# Altium PCB PCB1.pcbdoc
Units mm, origin at the board's own origin, x right, y up, seen from the top; angles counter-clockwise.
Board outline 81.1 x 38.7 mm, 2 copper layers (Top Layer, Bottom Layer); 45 components, 39 nets, 201 pads, 4 vias.
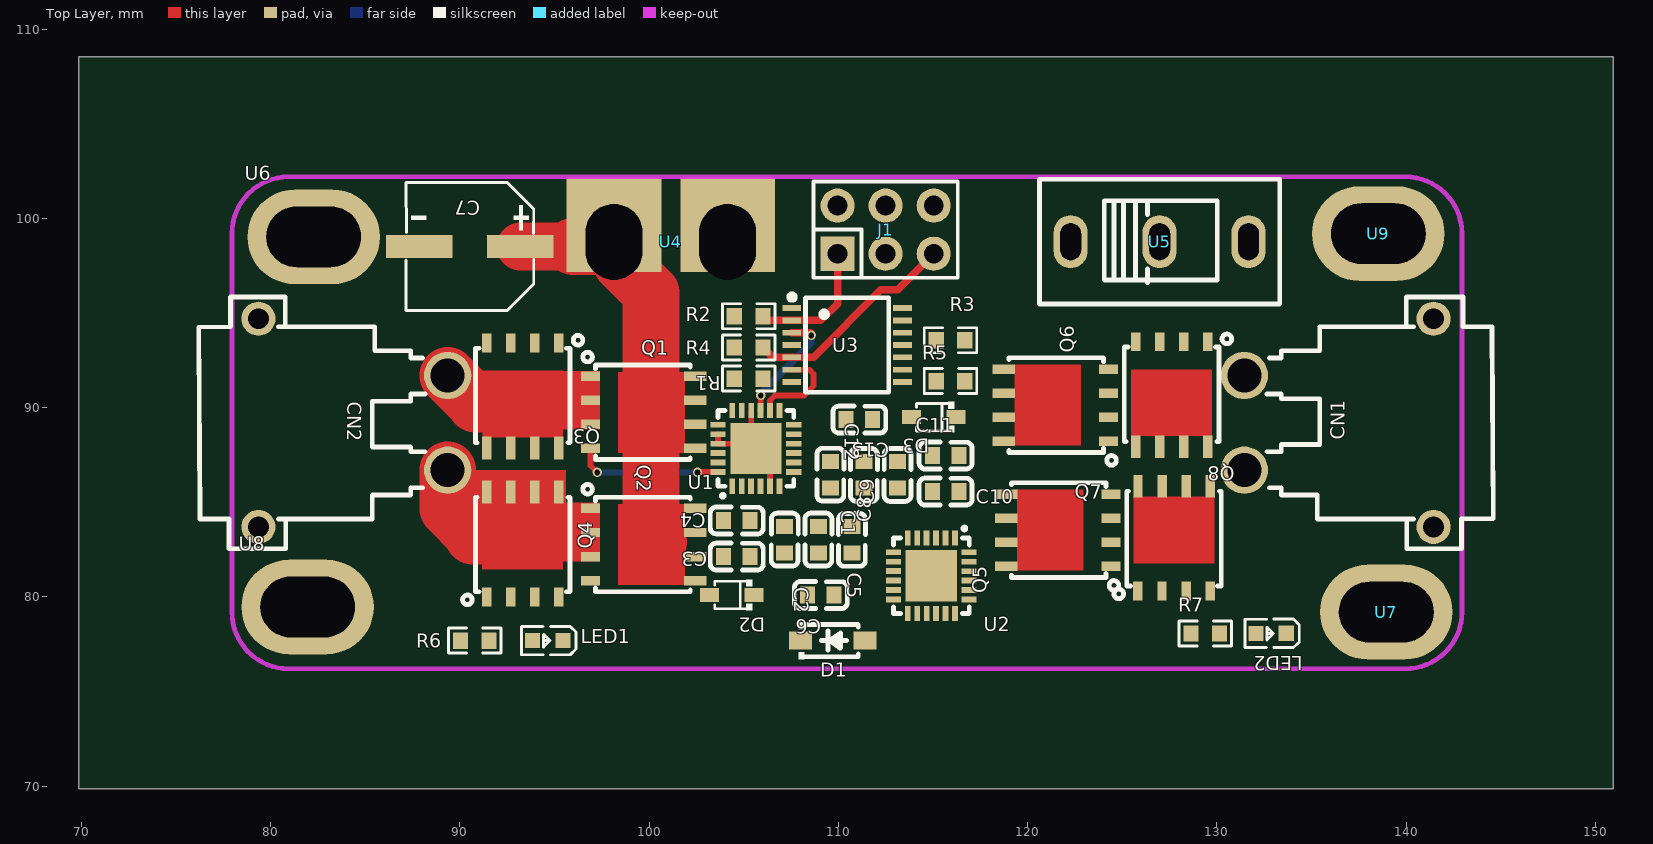
[diagram p0: Top Layer view]
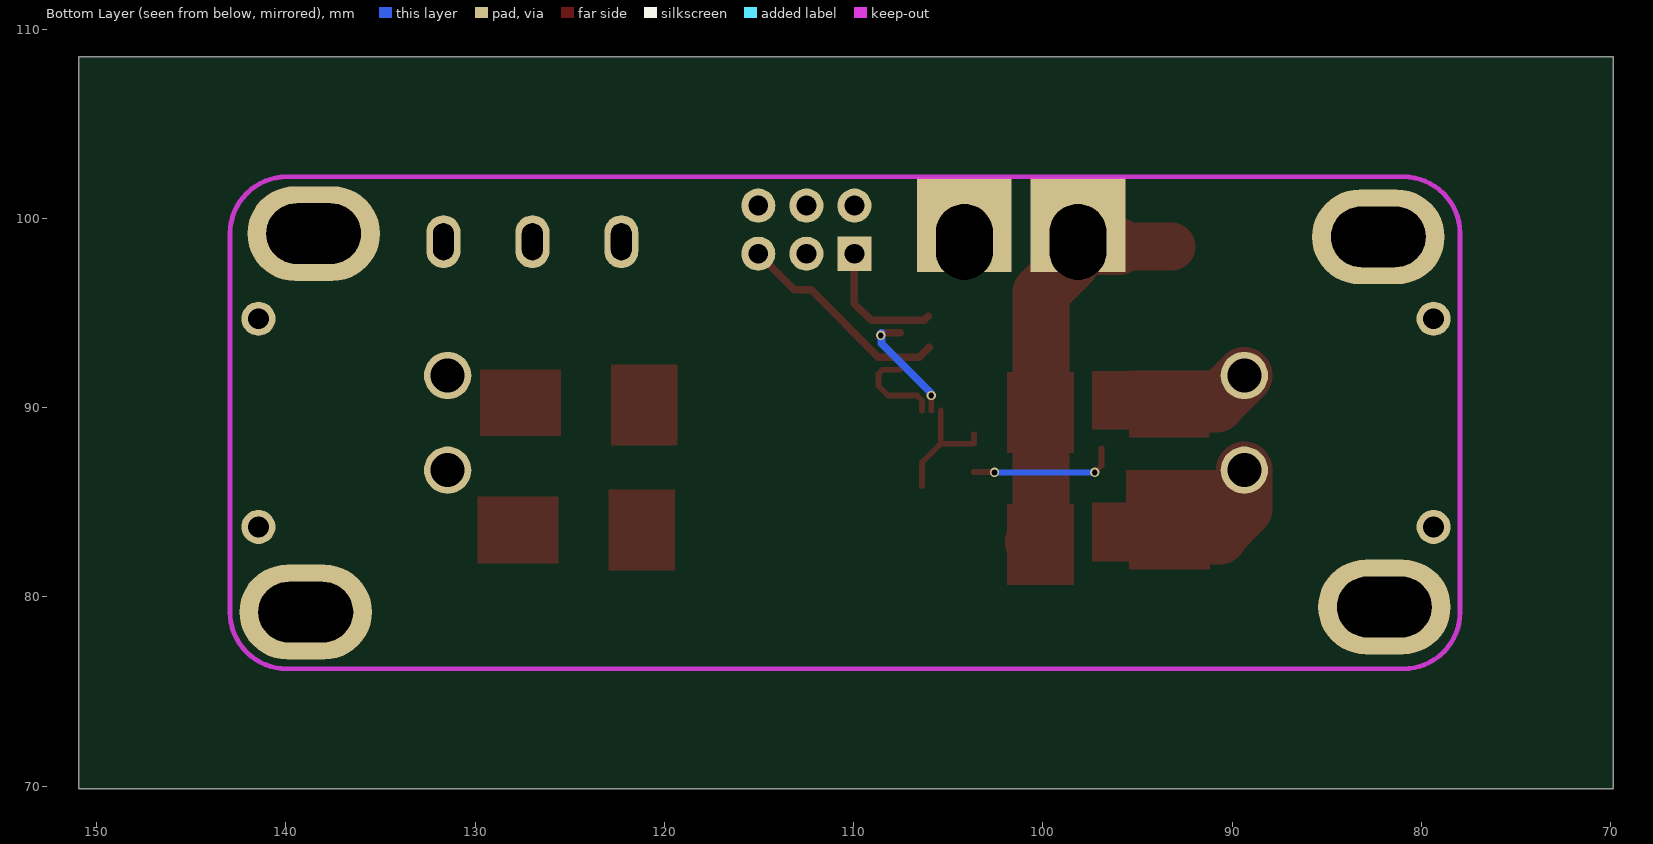
[diagram p1: Bottom Layer view, seen from below]

## Layer stack, top to bottom
Top Layer: signal copper (thickness not stored)
Dielectric: dielectric 0.32, FR-4, Dk 4.8
Bottom Layer: signal copper (thickness not stored)

## Board outline
150.949,69.85 69.85,69.85 69.85,108.55 150.949,108.55

## Components (designator, comment, footprint, x,y, rotation, side; value= is the part's Value field where it differs from the comment)
C1 "CAP_0603" C0603 108.938,83.023 r270 top
C2 "CAP_0603" C0603 107.16,83.023 r270 top
C3 "CAP_0603" C0603 104.62,82.134 r180 top
C4 "CAP_0603" C0603 104.62,84.039 r180 top
C5 "1uF" C0603 110.716,83.023 r90 top
C6 "1uF" C0603 109.065,80.102 r180 top
C7 "RVT1E221M0607" CAP-SMD_BD6.3-L6.6-W6.6-LS7.4-FD 90.523,98.517 r180 top
C8 "CAP_0603" C0603 111.351,86.452 r90 top
C9 "CAP_0603" C0603 113.129,86.452 r90 top
C10 "CAP_0603" C0603 115.669,85.563 r0 top
C11 "CAP_0603" C0603 115.669,87.468 r0 top
C12 "1uF" C0603 109.573,86.452 r270 top
C13 "1uF" C0603 111.097,89.373 r180 top
CN1 "XT30PW-M" CONN-TH_XT30PW-M 136.45,89.2 r90 top
CN2 "XT30PW-M" CONN-TH_XT30PW-M 84.35,89.2 r270 top
D1 "BZT52C3V3" SOD-123_L2.7-W1.6-LS3.7-RD-1 109.7,77.689 r0 top
D2 "1N5819WS_C191023" SOD-323_L1.8-W1.3-LS2.5-RD 104.366,80.102 r180 top
D3 "1N5819WS_C191023" SOD-323_L1.8-W1.3-LS2.5-RD 115.034,89.5 r180 top
J1 "2.54-2*3P针" HDR-TH_6P-P2.54-V-M-R2-C3-S2.54-1 112.494,99.406 r0 top
LED1 "LED_0603-R" LED_0603 94.587,77.689 r180 top
LED2 "LED_0603-R" LED_0603 132.814,78.07 r180 top
Q1 "TPH1R403NL,L1Q(M" DSOP-8_L5.0-W5.0-P1.27-LS6.0-BL-EP 99.667,89.754 r270 top
Q2 "TPH1R403NL,L1Q(M" DSOP-8_L5.0-W5.0-P1.27-LS6.0-BL-EP 99.667,82.769 r270 top
Q3 "TPH1R403NL,L1Q(M" DSOP-8_L5.0-W5.0-P1.27-LS6.0-BL-EP 93.317,90.643 r180 top
Q4 "TPH1R403NL,L1Q(M" DSOP-8_L5.0-W5.0-P1.27-LS6.0-BL-EP 93.315,82.769 r0 top
Q5 "TPH1R403NL,L1Q(M" DSOP-8_L5.0-W5.0-P1.27-LS6.0-BL-EP 121.638,83.531 r90 top
Q6 "TPH1R403NL,L1Q(M" DSOP-8_L5.0-W5.0-P1.27-LS6.0-BL-EP 121.511,90.135 r90 top
Q7 "TPH1R403NL,L1Q(M" DSOP-8_L5.0-W5.0-P1.27-LS6.0-BL-EP 127.733,83.081 r0 top
Q8 "TPH1R403NL,L1Q(M" DSOP-8_L5.0-W5.0-P1.27-LS6.0-BL-EP 127.607,90.712 r180 top
R1 "Res_0603" R0603 105.255,91.532 r180 top
R2 "Res_0603" R0603 105.255,94.834 r0 top
R3 "Res_0603" R0603 115.923,93.564 r0 top
R4 "Res_0603" R0603 105.255,93.183 r0 top
R5 "Res_0603" R0603 115.923,91.405 r0 top
R6 "Res_0603" R0603 90.777,77.689 r0 top
R7 "Res_0603" R0603 129.385,78.07 r180 top
U1 "DRV8701ERGET" VQFN-24_L4.0-W4.0-P0.50-LS4.0-BL-EP 105.635,87.851 r0 top
U2 "DRV8701ERGET" VQFN-24_L4.0-W4.0-P0.50-LS4.0-BL-EP 114.908,81.116 r180 top
U3 "SN74HC125PWR" TSSOP-14_L5.0-W4.4-P0.65-LS6.5-BL 110.462,93.31 r270 top
U4 "电源线焊盘" 电源线焊盘 101.191,99.787 r0 top
U5 "SS-12D10-G5" SW-TH_SS-12D10-G050 126.972,98.771 r0 top
U6 "M3-MountSlot" M3-MountSlot 82.268,99.025 r0 top
U7 "M3-MountSlot" M3-MountSlot 138.95,79.2 r0 top
U8 "M3-MountSlot" M3-MountSlot 81.95,79.467 r0 top
U9 "M3-MountSlot" M3-MountSlot 138.529,99.2 r0 top

## Footprints (in the part's own frame and the unit in brackets; to place one, negate y for a bottom-side part, rotate by r counter-clockwise, add the part's x,y. Pads: shape width x height; smd on the part's side, far side on the other; paste and mask are expansions set on the pad)
C0603 [mm]
  rect 0.8x0.9 smd paste+0 mask+0.051: 1(-0.7,0) 2(0.7,0)
  silkscreen extent -1.41,-0.71 1.39,0.72
CAP-SMD_BD6.3-L6.6-W6.6-LS7.4-FD [mm]
  rect 3.5x1.199 smd paste+0 mask+0.051: 1(-2.67,0) 2(2.67,0)
  silkscreen extent -3.38,-3.38 3.38,3.38
CONN-TH_XT30PW-M [mm]
  round 2.5 hole 1.8 paste+0 mask+0.051: 1(-2.5,5) 2(2.5,5)
  round 1.8 hole 1.1 paste+0 mask+0.051: 3(5.5,-5) 4(-5.5,-5)
  silkscreen extent -6.65,-8.15 6.65,3.81
DSOP-8_L5.0-W5.0-P1.27-LS6.0-BL-EP [mm]
  rect 0.5x1 smd paste-100 mask+0.05: 1(-1.906,-2.77) 2(-0.636,-2.77) 3(0.634,-2.77) 4(1.904,-2.77)
  rect 0.5x1.2 smd paste-100 mask+0.05: 5(1.906,2.77) 6(0.636,2.77) 7(-0.634,2.77) 8(-1.904,2.77)
  Top Layer region: -2.125,2.2 2.125,2.2 2.125,-1.3 -2.125,-1.3
  silkscreen extent -3.17,-3.17 2.5,2.5
HDR-TH_6P-P2.54-V-M-R2-C3-S2.54-1 [mm]
  rect 1.801x1.801 hole 1.049 paste+0 mask+0.051: 1(-2.54,-1.27)
  round 1.801 hole 1.049 paste+0 mask+0.051: 2(-2.54,1.27) 3(0,-1.27) 4(0,1.27) 5(2.54,-1.27) 6(2.54,1.27)
  silkscreen extent -3.81,-2.54 3.81,2.54
LED_0603 [mil]
  rect 31.5x31.5 smd paste+0 mask+2: 1(-33.5,-0.4) 2(29.5,-0.2)
  silkscreen extent -61,-30 53,30
M3-MountSlot [mm]
  oval 7x5 hole 3.2 slot 5 at 0 deg mask+0.051: 1(0,0)
R0603 [mm]
  rect 0.806x0.864 smd paste-100 mask+0.051: 1(-0.753,0) 2(0.753,0)
  silkscreen extent -1.39,-0.66 1.39,0.66
SOD-123_L2.7-W1.6-LS3.7-RD-1 [mm]
  rect 1.2x0.95 smd paste+0 mask+0.051: 1(-1.7,0) 2(1.7,0)
  silkscreen extent -1.81,-0.98 1.35,0.98
SOD-323_L1.8-W1.3-LS2.5-RD [mm]
  rect 1x0.75 smd paste+0 mask+0.051: 1(-1.173,0) 2(1.173,0)
  silkscreen extent -1.08,-0.8 0.9,0.8
SW-TH_SS-12D10-G050 [mm]
  oval 1.8x2.8 hole 1.1 slot 1.95 at 90 deg paste+0 mask+0.05: 1(-4.7,0) 2(0,0) 3(4.7,0)
  silkscreen extent -6.35,-3.3 6.35,3.3
TSSOP-14_L5.0-W4.4-P0.65-LS6.5-BL [mil]
  rect 12x39 smd paste+0 mask+1.97: 1(-76.8,-115.2) 2(-51.2,-115.2) 3(-25.6,-115.2) 4(0,-115.2) 5(25.6,-115.2) 6(51.2,-115.2) 7(76.8,-115.2) 8(76.8,115.2) 9(51.2,115.2) 10(25.6,115.2) 11(0,115.2) 12(-25.6,115.2) 13(-51.2,115.2) 14(-76.8,115.2)
  silkscreen extent -106,-121 98,87
VQFN-24_L4.0-W4.0-P0.50-LS4.0-BL-EP [mm]
  rect 0.3x0.8 smd paste-100 mask+0.05: 1(-1.25,-1.999) 2(-0.751,-2) 3(-0.25,-2) 4(0.25,-2) 5(0.751,-2) 6(1.251,-2) 13(1.25,2) 14(0.749,2) 15(0.249,2) 16(-0.25,2) 17(-0.749,2) 18(-1.25,2)
  rect 0.8x0.3 smd paste-100 mask+0.05: 7(2.001,-1.25) 8(2.001,-0.75) 9(2.001,-0.249) 10(2.001,0.251) 11(2.001,0.752) 12(2.001,1.251) 19(-2.001,1.25) 20(-2.001,0.75) 21(-2.001,0.251) 22(-2.001,-0.248) 23(-2.001,-0.749) 24(-2.001,-1.249)
  rect 2.7x2.7 smd paste-100 mask+0.05: 25(0.001,-0.002)
  silkscreen extent -2,-2.6 2,2
电源线焊盘 [mm]
  rect 5x5 hole 3 slot 4 at 90 deg copper offset 0,0.9 mask+0.051: 1(-3.048,-1.027) 2(2.952,-1.027)

## Via types
v1: diameter 0.5, hole 0.3, Top Layer to Bottom Layer, 4 vias

## Nets (pads, with @x,y where several pads share a name; then routed paths per layer and width w, separated by ;. In a path a pad name is that pad's centre, name@x,y a point inside that pad or via, vN(x,y) a via of type N, cw(c..) or ccw(c..) an arc to the next point about the centre after c; other vN are vias at no path point)
3V3: D1.1 R1.1 R7.2 U5.1
$1N6400: C2.2 C3.1 C4.1 D2.1 U1.1
$1N6511: C2.1 U1.2
$1N6531: C1.2 U1.3
$1N6589: C1.1 U1.4
$1N6702: C5.2 U1.6 U1.7 U1.12
$1N9279: Q1.4 U1.24 | length 2.5
  Top Layer w0.3: Q1.4 96.897,86.936 v1(97.254,86.579) ; v1@102.574,86.601 U1.24
  other v1: 102.552,86.579
$1N9610: Q3.4 U1.22
$1N14764: C13.2 U2.8
$1N14770: C12.2 U2.6 U2.7 U2.12
$1N14771: C8.1 U2.4
$1N14772: C9.2 C10.1 C11.1 D3.1 U2.1
$1N14774: C8.2 U2.3
$1N14775: C9.1 U2.2
$1N14776: Q5.4 U2.24
$1N14778: Q7.4 U2.22
$1N14779: Q6.4 U2.17
$1N14781: Q8.4 U2.19
$1N18419: LED1.2 R6.2
$1N20601: LED2.2 R7.1
$1N43543: Q2.4 U1.17
$1N45156: Q4.4 U1.19
DVDD: C6.2 U1.8 U3.14
GND: C3.2 C4.2 C5.1 C6.1 C7.2 C10.2 C11.2 C12.1 C13.1 CN1.3 CN1.4 CN2.3 CN2.4 D1.2 J1.3 J1.4 LED1.1 LED2.1 Q3.1 Q3.2 Q3.3 Q4.1 Q4.2 Q4.3 Q7.1 Q7.2 Q7.3 Q8.1 Q8.2 Q8.3 R2.1 R3.2 R4.1 R5.2 U1.5 U1.16 U1.20 U1.21 U1.25 U2.5 U2.16 U2.20 U2.21 U2.25 U3.1 U3.4 U3.7 U3.10 U3.13 U4.2 U6.1 U7.1 U8.1 U9.1 | length 6.7
  Top Layer w0.3: U1.20 U1.21 105.383,88.101 U1.25@105.384,88.1 ; U1.16 U1.25@105.384,88.1 ; U1.5 106.385,87.099 U1.25 U1.25@105.384,88.1
L_A: CN2.1 Q1.1 Q1.2 Q1.3 Q3.5 Q3.6 Q3.7 Q3.8 U1.23 | length 4.6
  Top Layer w3: CN2.1 90.817,90.233 90.817,90.193 93.316,90.193
L_B: CN2.2 Q2.1 Q2.2 Q2.3 Q4.5 Q4.6 Q4.7 Q4.8 U1.18 | length 6.6
  Top Layer w3: CN2.2 89.35,84.668 90.735,83.283 ; 90.671,83.219 93.315,83.219
L_EN: U1.14 U3.6 | length 5
  Top Layer w0.3: U1.14 106.384,90.375 106.652,90.643 108.176,90.643 108.684,91.151 108.684,91.786 108.46,92.01 U3.6
L_EN_IN: J1.5 R4.2 U3.5 | length 11.5
  Top Layer w0.4: R4.2 106.531,92.66 U3.5 108.668,92.66 108.684,92.675 112.24,96.231 113.129,96.231 J1.5
L_PH: U1.15 U3.3 | length 6.1
  Top Layer w0.3: U1.15 105.89,89.857 v1(105.89,90.643)
  Top Layer w0.4: U3.3 v1@108.524,93.96
  Bottom Layer w0.4: v1@105.89,90.77 108.524,93.404 v1@108.524,93.96
  other v1: 108.557,93.818
L_PH_IN: J1.1 R2.2 U3.2 | length 7
  Top Layer w0.4: R2.2@106.055,94.834 106.278,94.61 U3.2 109.067,94.61 109.954,95.497 J1.1
NSLEEP: R6.1 U1.13 U2.13 U5.2
R_A: CN1.1 Q5.1 Q5.2 Q5.3 Q7.5 Q7.6 Q7.7 Q7.8 U2.23
R_B: CN1.2 Q6.1 Q6.2 Q6.3 Q8.5 Q8.6 Q8.7 Q8.8 U2.18
R_EN: R5.1 U2.14 U3.8
R_EN_IN: J1.6 U3.9
R_PH: U2.15 U3.11
R_PH_IN: J1.2 R3.1 U3.12
VM: C7.1 D2.2 D3.2 Q1.5 Q1.6 Q1.7 Q1.8 Q2.5 Q2.6 Q2.7 Q2.8 Q5.5 Q5.6 Q5.7 Q5.8 Q6.5 Q6.6 Q6.7 Q6.8 R1.2 U4.1 | length 28.3
  Top Layer w2.54: C7.1 U4.1@95.984,98.517 ; U4.1@97,98.517 U4.1@98.143,99.66
  Top Layer w3: U4.1@95.984,98.517 U4.1@97,98.517 ; U4.1@98.524,99.66 98.524,97.641 100.098,96.067 100.098,83.296 100.498,82.896
  Bottom Layer w0.3: 97.254,86.579 102.552,86.579
"": U1.9 U1.10 U1.11 U2.9 U2.10 U2.11 U5.3

## Keep-outs
Board Outline Layer:
  lines w0.254 net "": 77.95,79.2 77.95,99.2 cw(c80.95,99.2) 80.95,102.2 139.95,102.2 cw(c139.95,99.2) 142.95,99.2 142.95,79.2 cw(c139.95,79.2) 139.95,76.2 80.95,76.2 cw(c80.95,79.2) 77.95,79.2

## Other copper
Top Layer:
  region net L_A: 91.158,88.871 97.398,88.871 97.398,91.913 91.158,91.913
  region net L_B: 91.211,81.886 97.397,81.886 97.397,84.969 91.211,84.969
  region net L_B: 89.35,84.928 95.603,84.928 95.603,86.7 89.35,86.7